# Altium PCB 智能家居-窗帘-电力板.PcbDoc
Units mm, origin at the board's own origin, x right, y up, seen from the top; angles counter-clockwise.
Board outline 65 x 65 mm, 2 copper layers (Top Layer, Bottom Layer); 19 components, 13 nets, 55 pads, 0 vias.
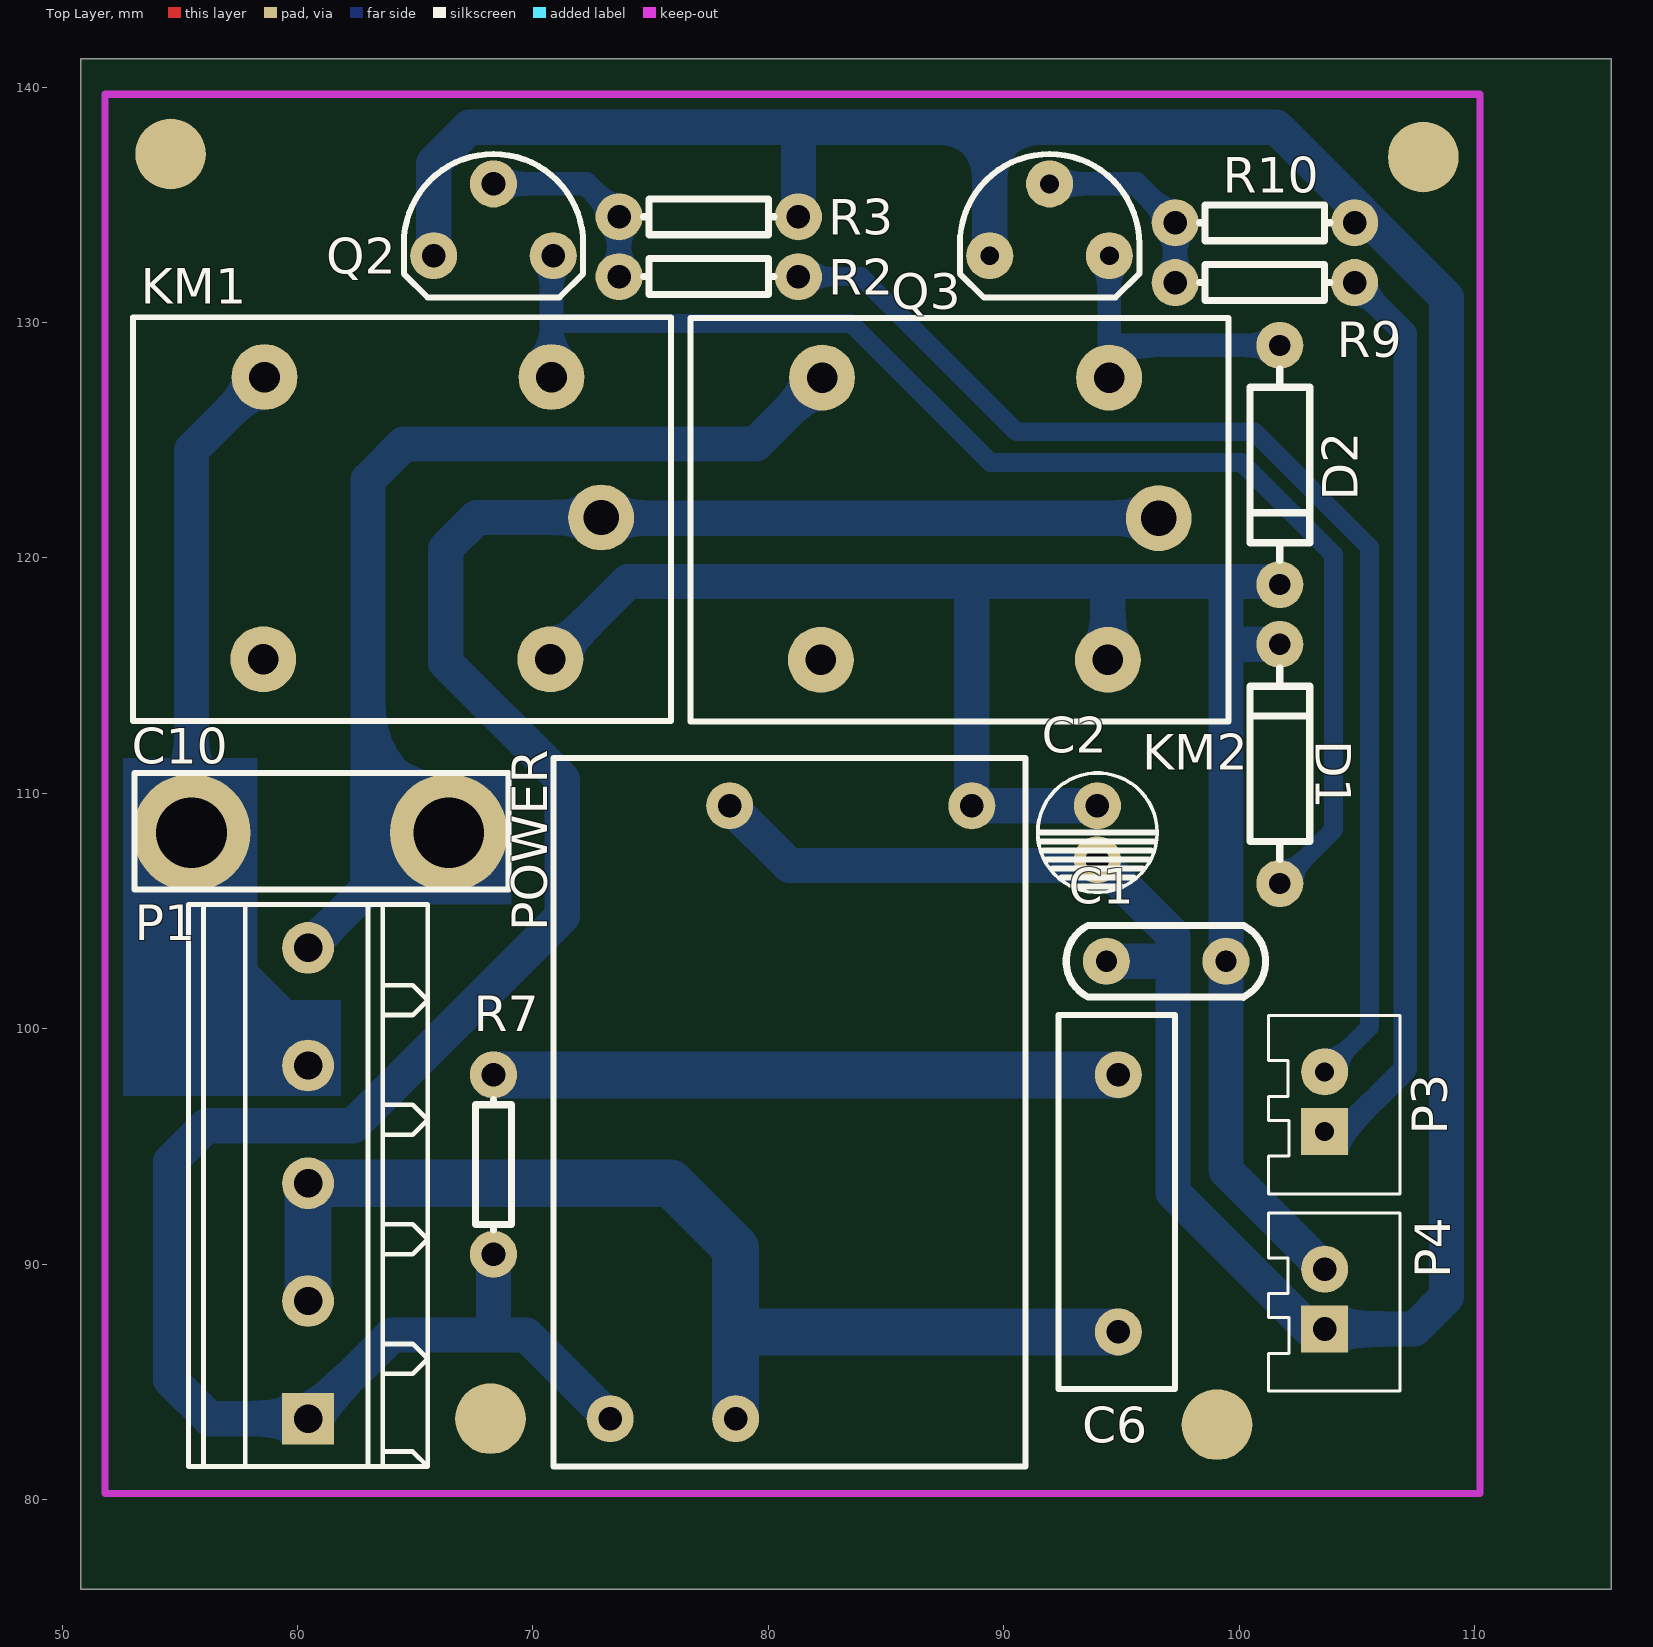
[diagram p0: Top Layer view]
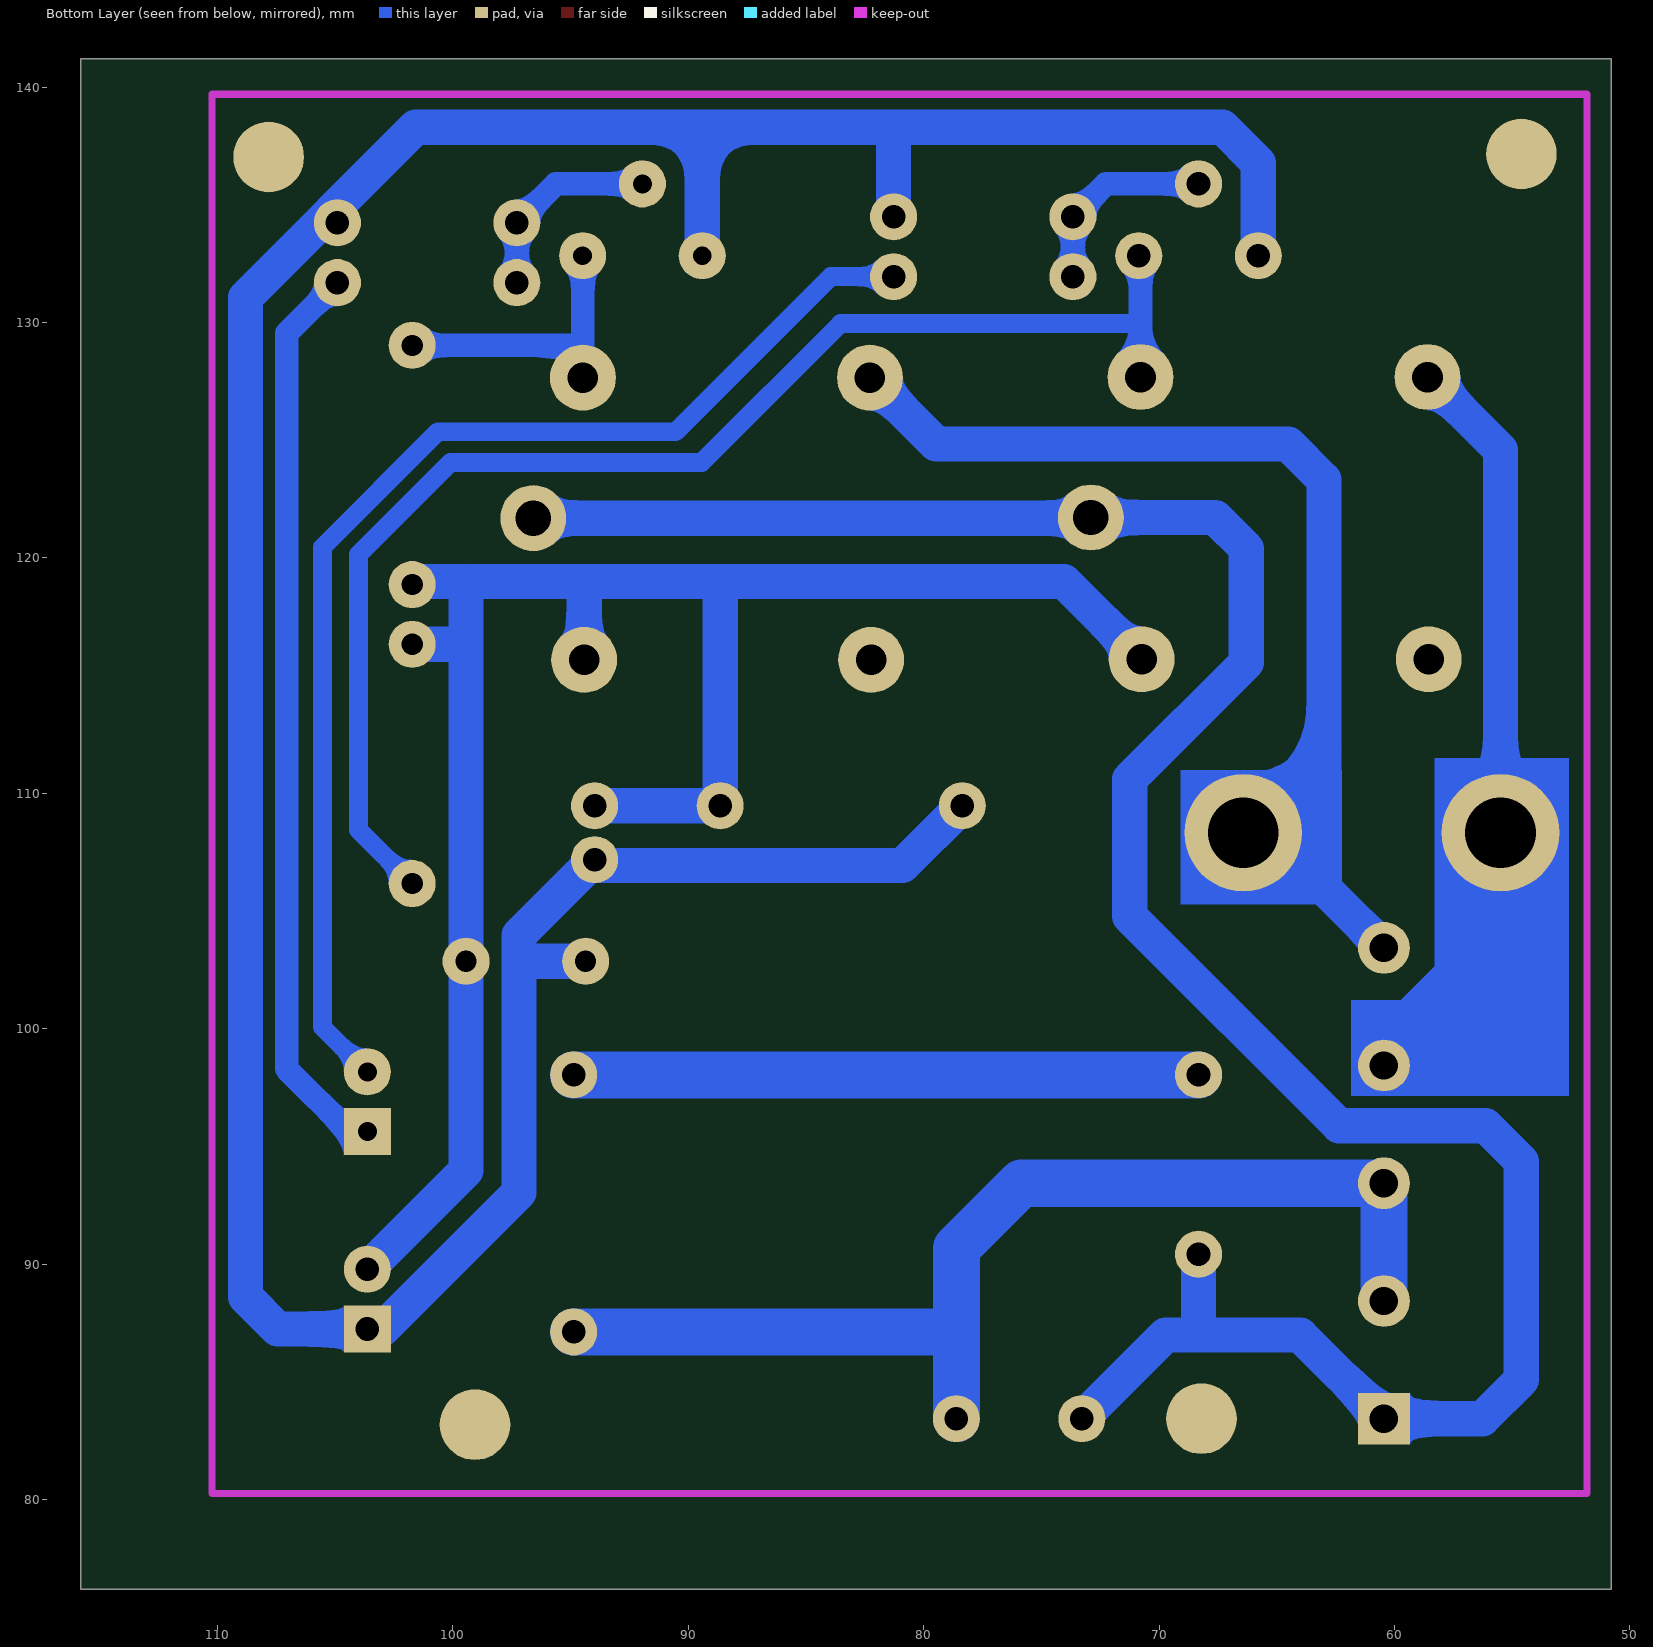
[diagram p1: Bottom Layer view, seen from below]

## Layer stack, top to bottom
Top Solder: solder mask 0.0102, Solder Resist, Dk 3.5
Top Layer: signal copper 0.0356
Dielectric 1: dielectric 0.32, FR-4, Dk 4.8
Bottom Layer: signal copper 0.0356
Bottom Solder: solder mask 0.0102, Solder Resist, Dk 3.5

## Board outline
50.8,76.2 115.8,76.2 115.8,141.2 50.8,141.2

## Design rules (kind name [scope] priority, off if disabled: settings)
Clearance [All] p1: gap=0.5
PolygonConnect [All] p1: connectstyle=Relief reliefconductorwidth=0.254 reliefentries=4 polygonreliefangle="90 Angle" airgapwidth=0.254
RoutingVias [All] p1: holewidth=1 width=2 viastyle="Through Hole" minholewidth=0.711 minwidth=1.27 maxholewidth=0.711 maxwidth=1.27
SolderMaskExpansion [All] p1: expansion=0.102
Width [All] p1: maxlimit=5 minlimit=0.5 preferedwidth=0.5 minimp=50.000000 maximp=50.000000 favimp=50.000000
30 further rules are at their usual default settings.

## Components (designator, comment, footprint, x,y, rotation, side; value= is the part's Value field where it differs from the comment)
C1 "0.01uF" 0.1UF 96.901,102.87 r180 top
C2 "Cap Pol1" CD5 93.98,109.474 r0 top
C6 "Cap" 0.1UF/275V#1 94.869,98.044 r270 top
C10 "Cap" 0.1UF/275V#2 66.421,108.331 r180 top
D1 "Diode" DIODE 101.727,106.172 r90 top
D2 "Diode" DIODE 101.727,129.032 r270 top
KM1 "12VDC" SRD_RELAY 65.722,121.691 r180 top
KM2 "12VDC" SRD_RELAY 89.408,121.666 r180 top
P1 "电源端口" JK128-500-5P 60.452,83.439 r180 top
P3 "电动窗帘控制端口" TJC3-2A#1 103.632,95.631 r90 top
P4 "控制板电源端口" TJC3-2A#2 103.632,87.249 r90 top
POWER "220/5开关电源" 220/5开关电源 73.279,83.439 r90 top
Q2 "8050" TO-92D#1 68.326,132.842 r0 top
Q3 "8050" TO-92D#2 91.948,132.842 r0 top
R2 "4.7K" AXIAL0.3 77.47,131.953 r180 top
R3 "4.7K" AXIAL0.3 77.47,134.493 r0 top
R7 "100" AXIAL0.3 68.326,94.234 r90 top
R9 "4.7K" AXIAL0.3 101.092,131.699 r180 top
R10 "4.7K" AXIAL0.3 101.092,134.239 r0 top

## Footprints (in the part's own frame and the unit in brackets; to place one, negate y for a bottom-side part, rotate by r counter-clockwise, add the part's x,y. Pads: shape width x height; smd on the part's side, far side on the other; paste and mask are expansions set on the pad)
0.1UF [mm]
  round 2 hole 0.9: 1(-2.54,0) 2(2.54,0)
  silkscreen extent -4.22,-1.52 4.25,1.53
0.1UF/275V#1 [mm]
  round 2 hole 1: 1(0,0) 2(10.922,0)
  silkscreen extent -2.54,-2.54 13.33,2.41
0.1UF/275V#2 [mm]
  round 5 hole 3: 1(0,0) 2(10.922,0)
  silkscreen extent -2.54,-2.54 13.33,2.41
220/5开关电源 [mm]
  round 2 hole 1: 1(0,0) 2(0,-5.334) 3(26.035,-5.08) 4(26.035,-15.367)
  silkscreen extent -2.03,-17.65 28.07,2.41
AXIAL0.3 [mm]
  round 2 hole 1: 1(-3.81,0) 2(3.81,0)
  silkscreen extent -2.77,-0.76 2.77,0.76
CD5 [mm]
  round 2 hole 1: 1(0,0) 2(0,-2.286)
  silkscreen extent -2.54,-3.68 2.54,1.39
DIODE [mm]
  round 2 hole 0.9: 1(0,0) 2(10.16,0)
  silkscreen extent 1.02,-1.27 9.14,1.27
JK128-500-5P [mm]
  rect 2.2x2.2 hole 1.2: 1(0,0)
  round 2.2 hole 1.2: 2(0,-5) 3(0,-10) 4(0,-15) 5(0,-20)
  silkscreen extent -5.08,-21.84 5.08,2.03
SRD_RELAY [mm]
  round 2.8 hole 1.3: 1(-5.017,5.994) 2(7.175,5.994) 3(7.125,-5.994) 4(-5.067,-5.994)
  round 2.8 hole 1.5: 5(-7.175,-0.025)
  silkscreen extent -10.15,-8.53 12.71,8.61
TJC3-2A#1 [mm]
  rect 2x2 hole 0.813: 1(0,0)
  round 2 hole 0.813: 2(2.54,0)
  silkscreen extent -2.64,-3.2 4.93,2.39
TJC3-2A#2 [mm]
  rect 2x2 hole 1: 1(0,0)
  round 2 hole 1: 2(2.54,0)
  silkscreen extent -2.64,-3.2 4.93,2.39
TO-92D#1 [mm]
  round 2 hole 1: 1(-2.54,0) 2(0,3.048) 3(2.54,0)
  silkscreen extent -3.81,-1.78 3.81,4.32
TO-92D#2 [mm]
  round 2 hole 0.8: 1(-2.54,0) 2(0,3.048) 3(2.54,0)
  silkscreen extent -3.81,-1.78 3.81,4.32

## Part data
C1: library part Cap, "Capacitor"
C2: "Polarized Capacitor (Radial)"
C6 C10: "Capacitor"
D1 D2: "Default Diode"
KM1 KM2: library part SRD-12VDC
P1: library part "Header 5", "Header, 5-Pin"
P3 P4: library part "Header 2", "Header, 2-Pin"
Q2 Q3: library part NPN, "NPN Bipolar Transistor"
R2 R3 R7 R9 R10: library part Res1, "Resistor"

## Free pads (board coordinates)
  round 3 all layers, no hole: 2(68.199,83.439) 3(54.61,137.16) 3(99.06,83.185) 3(107.823,137.033)

## Nets (pads, with @x,y where several pads share a name; then routed paths per layer and width w, separated by ;. In a path a pad name is that pad's centre, name@x,y a point inside that pad or via, vN(x,y) a via of type N, cw(c..) or ccw(c..) an arc to the next point about the centre after c; other vN are vias at no path point)
GND: C1.2 C2.2 P4.1 POWER.3 Q2.1 Q3.1 R3.2 R10.2 | length 151.6
  Bottom Layer w1.5: Q2.1 65.786,136.776 67.31,138.3 81.153,138.3 ; POWER.3 80.899,106.934 C2.2@94.234,106.934 ; R3.2 81.28,138.173 81.153,138.3 ; Q3.1 89.408,138.3 ; C2.2 C2.2@94.234,106.934 ; C1.2 96.611,102.87 ; 81.153,138.3 89.408,138.3 ; 89.408,138.3 101.575,138.3 108.811,131.064 108.811,88.618 107.442,87.249 P4.1 102.99,87.249 97.191,93.048 97.191,103.977 C2.2@94.234,106.934
L: KM1.5 KM2.5 P1.1 POWER.1 R7.1 | length 104.6
  Bottom Layer w1.5: R7.1 68.326,87.249 68.072,86.995 ; POWER.1 69.723,86.995 68.072,86.995 ; KM2.5 72.923,121.691 KM1.5 67.615,121.717 66.294,120.396 66.294,115.56 71.247,110.607 71.247,104.775 62.357,95.885 56.134,95.885 54.61,94.361 54.61,85.09 56.261,83.439 P1.1 64.008,86.995 68.072,86.995
L_OUT1: C10.2 KM1.3 P1.4 | length 29.8
  Bottom Layer w1.5: 55.499,103.392 C10.2 ; C10.2@55.499,110.49 55.499,124.587 KM1.3 ; 56.275,98.439 56.797,97.917 ; 56.642,103.759 56.642,103.251 59.563,100.33 60.579,100.33
L_OUT2: C10.1 KM2.3 P1.5 | length 47
  Bottom Layer w1.5: P1.5 62.992,105.979 62.992,111.887 ; C10.1 66.421,108.458 62.992,111.887 ; KM2.3 79.464,124.841 64.516,124.841 62.992,123.317 62.992,111.887
N: C6.2 P1.2 P1.3 POWER.2 | length 47.9
  Bottom Layer w2: P1.2 P1.3 75.852,93.439 78.613,90.678 78.613,86.868 ; POWER.2 78.613,86.868 ; C6.2 78.867,87.122 78.613,86.868
NetC6_1: C6.1 R7.2 | length 26.5
  Bottom Layer w2: R7.2 C6.1
NetD1_1: D1.1 KM1.4 Q2.3 | length 57.4
  Bottom Layer w0.8: 70.79,129.921 70.829,129.96 83.527,129.96 89.427,124.06 100.095,124.06 104.013,120.142 104.013,108.458 D1.1
  Bottom Layer w1: KM1.4 70.79,129.921 70.79,132.766 Q2.3
NetD2_1: D2.1 KM2.4 Q3.3 | length 12.5
  Bottom Layer w1: KM2.4 94.475,129.286 ; Q3.3 94.475,132.829 94.475,129.286 ; D2.1 94.729,129.032 94.475,129.286
NetP3_1: P3.1 R9.1 | length 38.8
  Bottom Layer w1: P3.1 104.394,95.631 107.061,98.298 107.061,129.54 R9.1
NetP3_2: P3.2 R2.1 | length 52.1
  Bottom Layer w0.8: R2.1 83.947,131.953 90.54,125.36 100.633,125.36 105.537,120.456 105.537,100.076 P3.2
NetQ2_2: Q2.2 R2.2 R3.1 | length 8.5
  Bottom Layer w1: Q2.2 72.263,135.89 R3.1 R2.2
NetQ3_2: Q3.2 R9.2 R10.1 | length 8.6
  Bottom Layer w1: Q3.2 95.631,135.89 R10.1 R9.2
VCC-12: C1.1 C2.1 D1.2 D2.2 KM1.1 KM2.1 P4.2 POWER.4 | length 84.3
  Bottom Layer w1.5: KM1.1 74.041,118.999 88.265,118.999 ; C2.1 POWER.4 88.646,118.618 88.265,118.999 ; KM2.1 94.424,118.554 94.869,118.999 ; D1.2 99.695,116.332 99.441,116.586 ; D2.2 101.6,118.999 99.314,118.999 ; P4.2 99.441,93.98 C1.1 99.441,116.586 ; 88.265,118.999 94.869,118.999 ; 94.869,118.999 99.314,118.999 ; 99.314,118.999 99.441,118.872 99.441,116.586
pads on no net: KM1.2 KM2.2

## Keep-outs
Keep-Out Layer:
  lines w0.3: 51.816,80.264 110.236,80.264 110.236,139.7 51.816,139.7 51.816,80.264

## Other copper
Bottom Layer:
  rectangle net L_OUT1: 57.277,97.155 61.849,101.219
  rectangle net L_OUT1: 52.578,97.155 58.293,111.506
  rectangle net L_OUT2: 62.23,105.283 69.088,110.998

## Silkscreen, mask and mechanical layers (free items; w line width, h text height)
Drill Drawing:
  text ".LEGEND" at 120.88,81.28 h1.52
  text "Drill Drawing." at 120.88,78.74 h1.52

## Dimensions
51.816,80.264 to 110.236,80.264 on Mechanical 1
51.816,80.264 to 51.816,139.7 on Mechanical 1